# EAGLE board i2c-hub (EAGLE 6.4)
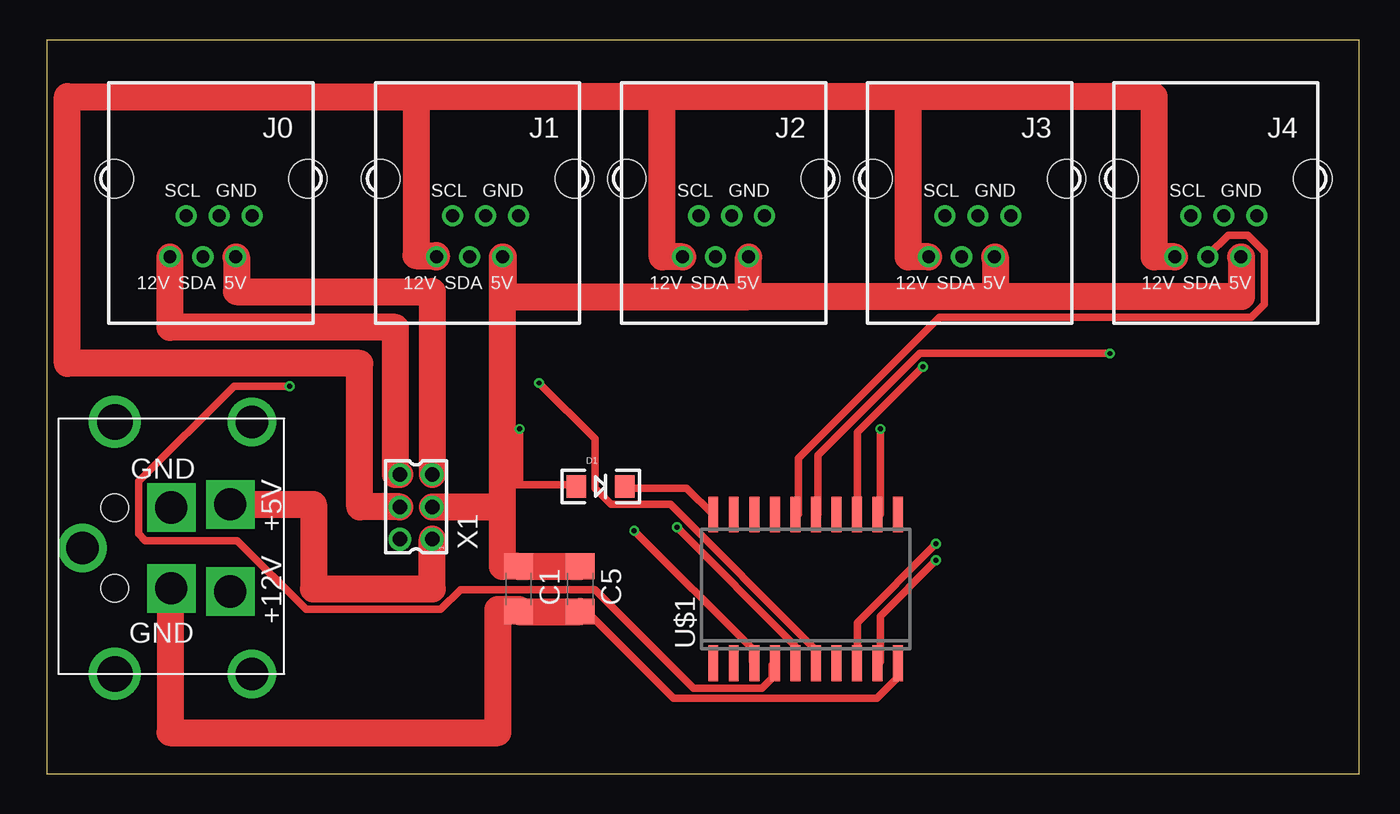
[diagram p0: board, top side]
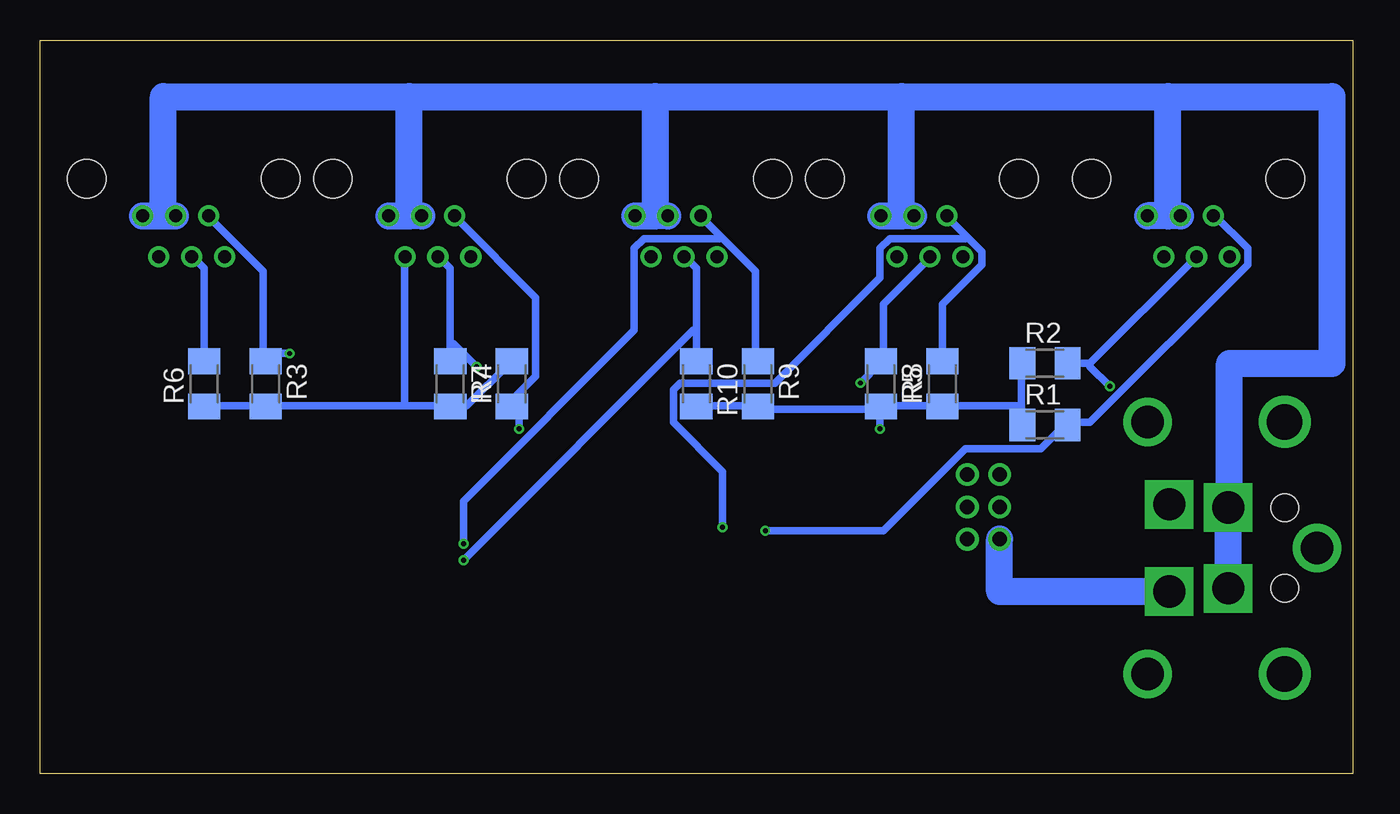
[diagram p1: board, bottom side, seen from below]

Size 81.27 x 45.39 mm. Coordinates in mm from the lower left corner, seen from the top.
Outline: 0,0 81.27,0 81.27,45.39 0,45.39 0,0
Copper layers (1*16): Top 0.035mm / dielectric 1.5mm / Bottom 0.035mm
Design rules "default": minimum track width 6mil, minimum drill 12mil, track to track 6mil, track to pad 6mil, pad to pad 6mil, via to via 6mil, smd to smd 0mil, copper to edge 10mil, drill to drill 10mil, minimum pad ring 10mil, minimum via ring 6mil, stop-mask expansion 2mil, vias tented up to drill 100mil, thermal gap 10mil
Net classes: 0 default: width 0.457 mm; 1 power: width 0.457 mm; 2 highpower: width 1.372 mm; 3 fine: width 0.457 mm
vRestrict: area 39.4,3.8 to 54.6,19.1

## Footprints (pad centres in the part's own frame; a part is rotated, then mirrored left to right if it is on the bottom)
C1206 = smd 1.6 x 1.8: 1 -1.4,0; 2 1.4,0
LED-1206 = smd 1.2 x 1.4: A -1.5,0; C 1.5,0
RJ12-RIGHTANGLE-I2C = drill 0.8 pad 1.3: +5V -1.54,4.84; +12V 2.54,4.84; GND1 -2.54,2.3; GND2 -0.5,2.3; SCL 1.54,2.3; SDA 0.5,4.84 | hole 2.36: -6,0; 6,0
M1206 = smd 1.6 x 2: 1 -1.4,0; 2 1.4,0
SO20W = smd 0.6 x 2.2: 1 -5.715,-4.6; 2 -4.445,-4.6; 3 -3.175,-4.6; 4 -1.905,-4.6; 5 -0.635,-4.6; 6 0.635,-4.6; 7 1.905,-4.6; 8 3.175,-4.6; 9 4.445,-4.6; 10 5.715,-4.6; 11 5.715,4.6; 12 4.445,4.6; 13 3.175,4.6; 14 1.905,4.6; 15 0.635,4.6; 16 -0.635,4.6; 17 -1.905,4.6; 18 -3.175,4.6; 19 -4.445,4.6; 20 -5.715,4.6
KPJX-4S-S = drill 2 square: +5V 2.7,1.35; +12V -2.7,1.35; GND1 -2.5,5; GND2 2.5,5 | drill 2: P$1 -7.8,0; P$2 7.8,0; P$11 0,10.5 | drill 2.2: P$3 -7.8,8.5; P$4 7.8,8.5 | hole 1.7: -2.5,8.5; 2.5,8.5
87758-0616 = drill 0.9 pad 1.27: 1 -2,-1; 2 -2,1; 3 0,-1; 4 0,1; 5 2,-1; 6 2,1

## Placement (x,y rotation side)
C1  100nF  [C1206]  29.21,11.43 270 top
C5  10uF  [C1206]  33.02,11.43 270 top
D1  1N581D1206  [LED-1206]  34.29,17.78 0 top
J0  RJ12RIGHTANGLE-I2C  [RJ12-RIGHTANGLE-I2C]  10.16,36.83 180 top
J1  RJ12RIGHTANGLE-I2C  [RJ12-RIGHTANGLE-I2C]  26.67,36.83 180 top
J2  RJ12RIGHTANGLE-I2C  [RJ12-RIGHTANGLE-I2C]  41.91,36.83 180 top
J3  RJ12RIGHTANGLE-I2C  [RJ12-RIGHTANGLE-I2C]  57.15,36.83 180 top
J4  RJ12RIGHTANGLE-I2C  [RJ12-RIGHTANGLE-I2C]  72.39,36.83 180 top
R1  10K  [M1206]  19.05,21.59 0 bottom
R2  10K  [M1206]  19.05,25.4 0 bottom
R3  10K  [M1206]  67.31,24.13 270 bottom
R4  10K  [M1206]  55.88,24.13 270 bottom
R5  10K  [M1206]  25.4,24.13 90 bottom
R6  10K  [M1206]  71.12,24.13 90 bottom
R7  10K  [M1206]  52.07,24.13 90 bottom
R8  10K  [M1206]  29.21,24.13 270 bottom
R9  10K  [M1206]  36.83,24.13 270 bottom
R10  10K  [M1206]  40.64,24.13 270 bottom
U$1  PCA9518  [SO20W]  46.99,11.43 0 top
U$2  KPJX-4S-S  [KPJX-4S-S]  12.7,13.97 90 top
X1  87758-0616  [87758-0616]  22.86,16.51 90 top

## Library data of the parts
C1 C5 = rcl
D1 J0 J1-J4 U$1 U$2 = lpatiny
R1-R10 = resistor
X1 = con-molex; MPN: 87758-0616; OC_FARNELL: 7472323; OC_NEWARK: 25M5667

## Nets
+5V: C1.1 C5.1 D1.A J1.+5V J2.+5V J3.+5V J4.+5V R1.1 R2.1 R3.2 R4.2 R5.1 R6.1 R7.2 R8.2 R9.2 R10.2 X1.3
+5V1 [power]: D1.C U$1.20
+12V: J1.+12V J2.+12V J3.+12V J4.+12V X1.4
EXT-5V [highpower]: U$2.+5V X1.1
EXT-12V [highpower]: U$2.+12V X1.2
GND [power]: C1.2 C5.2 J0.GND1 J0.GND2 J1.GND1 J1.GND2 J2.GND1 J2.GND2 J3.GND1 J3.GND2 J4.GND1 J4.GND2 U$1.10 U$2.GND1 U$2.GND2
I2C-5V [power]: J0.+5V X1.5
I2C-12V: J0.+12V X1.6
SCL0: J0.SCL R1.2 U$1.3
SCL1: J1.SCL R5.2 U$1.5
SCL2: J2.SCL R9.1 U$1.8
SCL3: J3.SCL R7.1 U$1.12
SCL4: J4.SCL R3.1 U$1.15
SDA0: J0.SDA R2.2 U$1.4
SDA1: J1.SDA R8.1 U$1.6
SDA2: J2.SDA R10.1 U$1.9
SDA3: J3.SDA R4.1 U$1.13
SDA4: J4.SDA R6.2 U$1.16

## Tracks (layer width: path | path; a pad name or v marks a point on that pad's centre or on a via)
+5V  (via drill 0.3)
  Top 0.457: 29.26,17.88 32.72,17.88 D1.A | 29.26,17.88 28.21,17.88 | v29.26,21.34 29.26,17.88
  Top 1.676: X1.3 28.21,16.51 | 28.21,16.51 28.21,17.88 J1.+5V 28.26,31.99 28.26,29.53 43.45,29.53 | 43.45,29.53 J2.+5V | J3.+5V 58.74,31.99 58.74,29.53 | 58.74,29.53 43.45,29.53 | J4.+5V 73.98,31.99 73.98,29.53 58.74,29.53 | 28.21,16.51 28.21,12.83 C1.1 C5.1
  Bottom 0.457: R6.1 71.12,22.76 67.46,22.76 R3.2 67.26,22.76 58.73,22.76 | R7.2 52.22,25.4 54.86,22.76 55.88,22.76 R4.2 56.08,22.76 58.73,22.76 | R10.2 40.64,22.76 36.98,22.76 R9.2 36.78,22.55 29.46,22.55 R8.2 | 20.52,22.76 20.52,25.4 R2.1 | 20.52,22.76 20.52,21.74 R1.1 | R8.2 29.06,22.76 25.4,22.76 R5.1 25.2,22.76 20.52,22.76 | v29.26,21.34 29.26,22.55 R8.2 | 58.73,22.76 58.73,31.9 J3.+5V
+5V1
  Top 0.457: D1.C 35.97,17.68 39.62,17.68 41.25,16.05 U$1.20
+12V
  Top 1.676: X1.4 19.37,16.51 19.37,25.4 1.27,25.4 1.27,41.91 22.86,41.91 | 22.86,41.91 22.86,32.07 24.13,32.07 J1.+12V | J2.+12V 38.1,31.99 38.1,41.91 | 38.1,41.91 22.86,41.91 | J3.+12V 53.34,31.99 53.34,41.91 | 53.34,41.91 38.1,41.91 | J4.+12V 68.58,31.99 68.58,41.91 53.34,41.91
EXT-5V
  Top 1.676: U$2.+5V 16.51,16.67 16.51,11.43 23.86,11.43 X1.1
EXT-12V
  Bottom 1.676: U$2.+12V 21.86,11.27 X1.2
GND
  Top 0.457: U$1.10 52.63,6.71 52.63,5.89 51.41,4.67 38.81,4.67 33.73,9.75 C5.2
  Top 1.676: U$2.GND1 7.62,11.47 7.62,2.54 27.94,2.54 27.94,10.16 29.21,10.16 C1.2 C5.2
  Bottom 0.457: U$2.GND2 7.72,16.46 7.62,16.47
  Bottom 1.676: 7.62,16.47 7.62,25.4 1.27,25.4 1.27,41.91 11.43,41.91 | J0.GND1 J0.GND2 11.43,34.53 11.43,41.91 | J1.GND1 27.94,34.53 | J1.GND2 27.94,34.53 | 27.94,34.53 27.94,41.91 | 27.94,41.91 11.43,41.91 | J2.GND1 43.18,34.53 | J2.GND2 43.18,34.53 | 43.18,34.53 43.18,41.91 | 43.18,41.91 27.94,41.91 | J3.GND1 58.42,34.53 | J3.GND2 58.42,34.53 | 58.42,34.53 58.42,41.91 | 58.42,41.91 43.18,41.91 | J4.GND1 J4.GND2 73.66,34.53 73.66,41.91 58.42,41.91 | U$2.GND1 U$2.GND2
I2C-5V
  Top 1.676: J0.+5V 11.75,31.99 11.75,29.84 23.86,29.84 X1.5
I2C-12V
  Top 1.676: X1.6 21.59,18.51 21.59,27.62 7.62,27.62 J0.+12V
SCL0  (via drill 0.3)
  Top 0.457: v36.37,15.04 43.69,7.72 43.69,6.91 U$1.3
  Bottom 0.457: J0.SCL 8.53,34.54 6.5,32.51 6.5,31.5 16.26,21.74 17.48,21.74 R1.2 17.88,21.54 19.3,20.12 23.98,20.12 29.06,15.04 v36.37,15.04
SCL1  (via drill 0.3)
  Top 0.457: v39.01,15.24 46.33,7.92 46.33,6.91 U$1.5
  Bottom 0.457: R5.2 25.4,29.06 22.96,31.5 22.96,32.31 23.88,33.22 | 23.88,33.22 24.99,34.34 J1.SCL | v39.01,15.24 39.01,18.69 42.06,21.74 42.06,23.77 41.66,24.18 35.76,24.18 29.26,30.68 29.26,32.51 28.65,33.12 23.98,33.12 23.88,33.22
SCL2  (via drill 0.3)
  Top 0.457: v55.07,14.22 50.19,9.35 50.19,6.91 U$1.8
  Bottom 0.457: 39.12,33.22 40.23,34.34 J2.SCL | 39.12,33.22 36.98,31.09 36.98,25.6 R9.1 | v55.07,14.22 55.07,16.87 44.5,27.43 44.5,32.51 43.89,33.12 39.22,33.12 39.12,33.22
SCL3  (via drill 0.3)
  Top 0.457: v51.61,21.34 51.61,16.05 U$1.12
  Bottom 0.457: J3.SCL 55.47,34.34 50.6,29.46 50.6,24.59 52.02,23.16 52.02,22.76 R7.1 51.61,23.37 v51.61,21.34
SCL4  (via drill 0.3)
  Top 0.457: v65.84,26.01 54.05,26.01 47.75,19.71 47.75,16.05 U$1.15
  Bottom 0.457: J4.SCL 70.71,34.34 67.46,31.09 67.46,25.6 R3.1 67.26,26.01 v65.84,26.01
SDA0  (via drill 0.3)
  Top 0.457: v15.04,23.98 11.58,23.98 5.69,18.09 5.69,14.83 6.1,14.43 11.79,14.43 16.05,10.16 24.38,10.16 25.6,11.38 33.93,11.38 40.03,5.28 44.3,5.28 44.91,5.89 44.91,6.71 U$1.4
  Bottom 0.457: 16.26,25.4 R2.2 | 16.26,25.4 9.75,31.9 J0.SDA | v15.04,23.98 16.26,25.2 16.26,25.4
SDA1  (via drill 0.3)
  Top 0.457: v30.48,24.18 33.93,20.73 33.93,17.68 34.95,16.66 38.61,16.66 47.55,7.72 47.55,6.91 U$1.6
  Bottom 0.457: J1.SDA 26.21,31.9 29.06,29.06 29.06,25.6 R8.1 29.26,25.4 v30.48,24.18
SDA2  (via drill 0.3)
  Top 0.457: v55.07,13.21 51.61,9.75 51.61,6.91 U$1.9
  Bottom 0.457: 40.64,27.43 40.64,31.29 41.25,31.9 J2.SDA | 40.64,27.43 R10.1 | v55.07,13.21 40.84,27.43 40.64,27.43
SDA3  (via drill 0.3)
  Top 0.457: v54.25,25.2 50.19,21.13 50.19,16.05 U$1.13
  Bottom 0.457: 55.88,26.62 55.88,31.29 56.49,31.9 J3.SDA | 55.88,26.62 R4.1 | v54.25,25.2 55.68,26.62 55.88,26.62
SDA4
  Top 0.457: U$1.16 46.53,16.05 46.53,19.51 55.27,28.25 74.57,28.25 75.39,29.06 75.39,32.31 74.37,33.33 73.15,33.33 71.93,32.11 J4.SDA
  Bottom 0.457: R6.2 71.12,31.29 71.73,31.9 J4.SDA